# Altium PCB Morpheus_bottom.PcbDoc (part 2 of 2)
Units mm, origin at the board's own origin, x right, y up, seen from the top; angles counter-clockwise.
Board outline 38.8 x 25.11 mm, 4 copper layers (Top Layer, GND, PWR, Bottom Layer), stack 0.981 mm thick; 78 components, 39 nets, 307 pads, 147 vias.
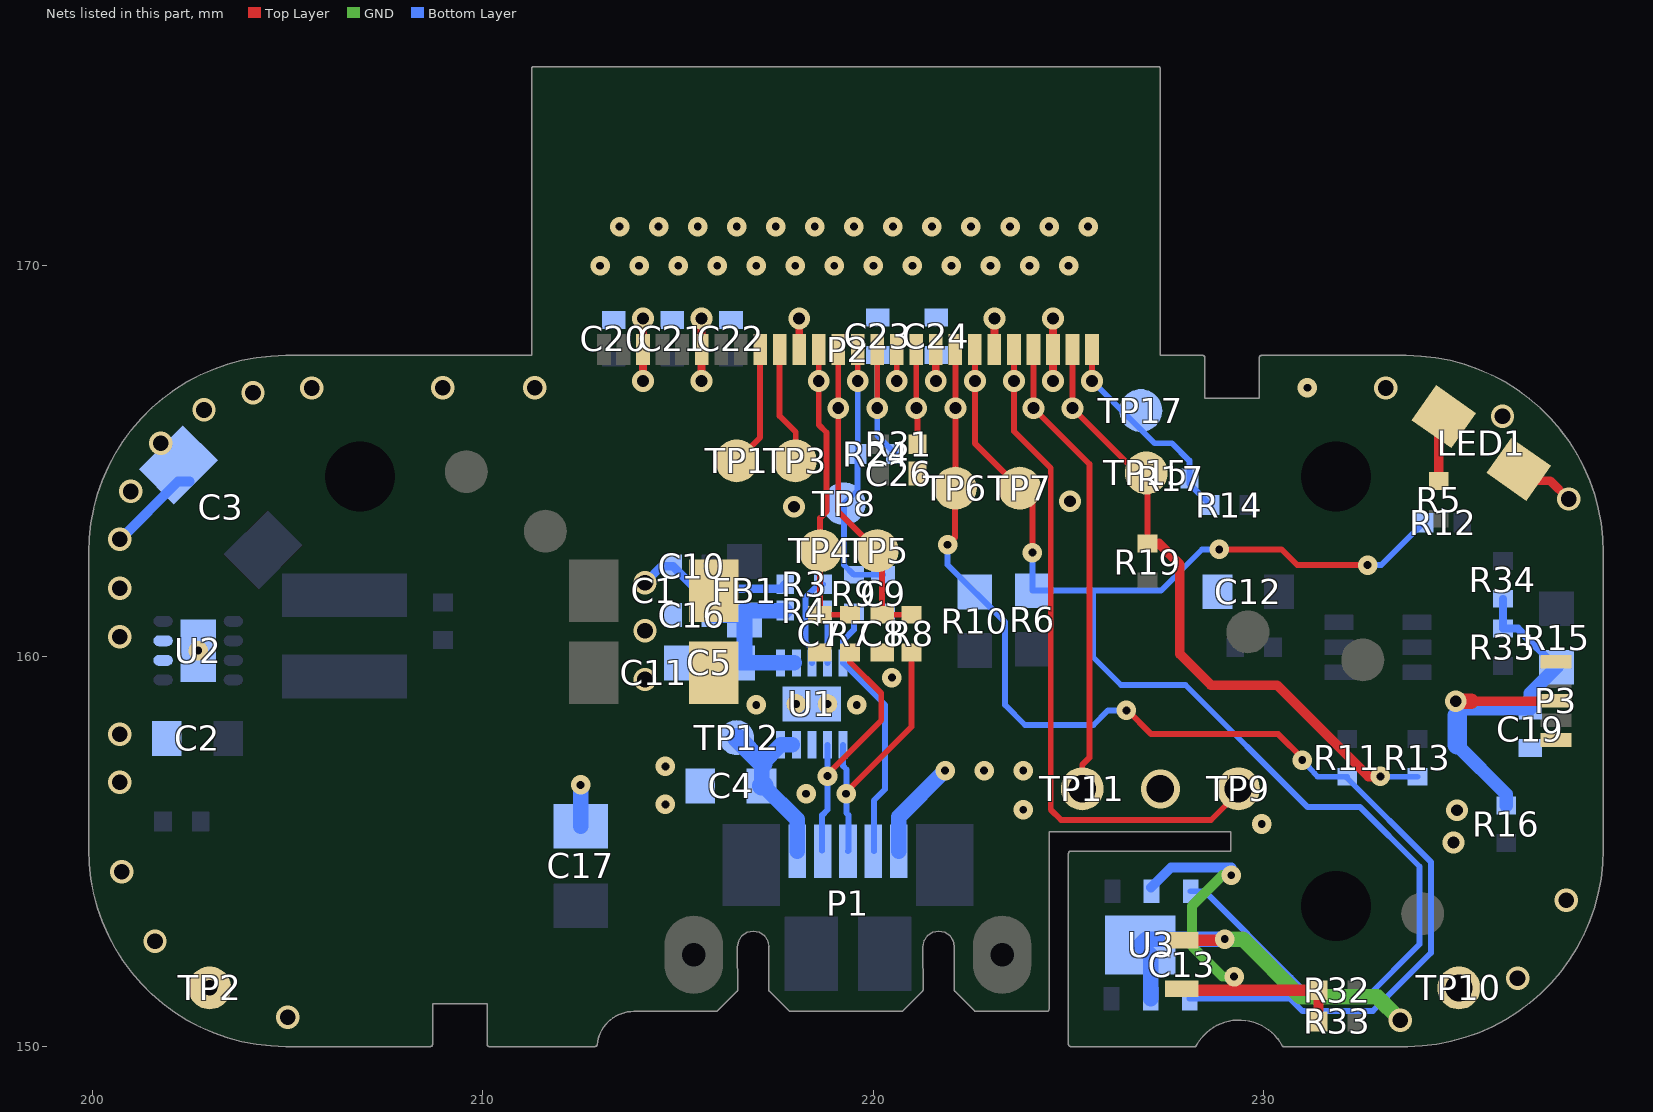
[diagram p4: the nets of this part, all layers, seen from the top]

## Via types
v1: diameter 0.5, hole 0.2, Top Layer to Bottom Layer, 45 vias
v2: diameter 0.6, hole 0.4, Top Layer to Bottom Layer, 40 vias
v3: diameter 0.559, hole 0.305, Top Layer to Bottom Layer, 31 vias
v4: diameter 0.5, hole 0.2, Top Layer to Bottom Layer, tented both sides, 26 vias
v5: diameter 1, hole 0.7, Top Layer to Bottom Layer, 4 vias
v6: diameter 2, hole 1.8, Top Layer to Bottom Layer, 1 vias

## Nets (pads, with @x,y where several pads share a name; then routed paths per layer and width w, separated by ;. In a path a pad name is that pad's centre, name@x,y a point inside that pad or via, vN(x,y) a via of type N, cw(c..) or ccw(c..) an arc to the next point about the centre after c; other vN are vias at no path point) (continued)
GND: C1.1 C2.1 C3.1 C4.1 C5.1 C7.1 C8.1 C9.1 C10.1 C11.1 C12.2 C13.1 C16.1 C17.2 C19.1 C20.2 C21.2 C22.2 C23.2 C24.2 C26.1 LED1.2 P1.5 P2.3 P2.6 P2.11 P2.21 P2.24 P3.1 P3.5 R3.2 TP2.1 TP10.1 U1.8 U1.11 U2.2 U2.3 U2.9 U3.2 U3.7 | length 27.7
  Top Layer w0.2: v3(214.1,167.05) P2.3@214.1,167.85 v3(214.1,168.65) ; v3(215.6,167.05) P2.6@215.6,167.85 v3(215.6,168.65) ; P2.11@218.1,167.85 v3(218.1,168.65) ; P2.21@223.1,167.85 v3(223.1,168.65) ; v3(224.6,167.05) P2.24@224.6,167.85 v3(224.6,168.65)
  Top Layer w0.22: LED1.2@236.868,164.491 237.339,164.491 v2(237.808,164.023)
  Top Layer w0.3: C13.1@227.9,152.725 v1@228.975,152.725
  GND w0.4: v1(229,152.75) 229.465,152.75 230.944,151.271 232.904,151.271 v2(233.5,150.675)
  Bottom Layer w0.22: v2(214.15,161.875) 214.575,162.3 C10.1@214.867,162.3 215.438,161.73 217.633,161.73 R3.2@217.742,161.839
  Bottom Layer w0.254: v2@200.712,162.991 202.193,164.471 C3.1@202.489,164.471
  Bottom Layer w0.4: C17.2@212.5,155.641 v1(212.5,156.7) ; P1.5@220.65,155 220.65,155.879 v1(221.837,157.066) ; U3.2@227.1,151.225 227.1,152.338 U3.7@226.837,152.6 226.987,152.75 v1(229,152.75)
  other v1: 229.948,155.699 223.837,156.066 214.675,156.2 218.275,156.475 222.837,157.066 223.837,157.066 214.675,157.175 217,158.75 219.575,158.75 220.475,159.45 202.707,160.141 231.117,166.875
  other v2: 205,150.75 203,151.5 236.5,151.75 201.6,152.7 237.75,153.75 200.748,154.475 200.7,156.766 200.7,158 214.15,159.4 200.7,160.5 214.15,160.65 200.7,161.741 200.7,162.991 200.982,164.217 201.747,165.45 236.115,166.139 202.855,166.305 204.111,166.748 205.612,166.867 208.975,166.875 211.325,166.875 233.123,166.867
  other v3: 234.862,155.229 234.95,156.052 217.97,163.825 225.037,163.966
  other v4: 213,170 214,170 215,170 216,170 217,170 218,170 219,170 220,170 221,170 222,170 223,170 224,170 225,170 213.5,171 214.5,171 215.5,171 216.5,171 217.5,171 218.5,171 219.5,171 220.5,171 221.5,171 222.5,171 223.5,171 224.5,171 225.5,171
  other v5: 235,151.5 227.35,156.6
I2C_SCL: P2.20 R6.1 R12.1 TP7.1 U3.6 | length 39.7
  Top Layer w0.15: P2.20@222.6,167.85 v3(222.6,167.05) 222.6,165.45 TP7.1@223.75,164.3 224.075,163.975 v1(224.075,162.65) ; v1(228.858,162.731) 230.458,162.731 230.856,162.333 v1(232.658,162.333)
  Bottom Layer w0.15: v1(224.075,162.65) R6.1@224.075,161.676 225.627,161.676 ; U3.6@228.125,153.975 228.487,153.975 230.692,151.769 231.206,151.257 232.629,151.257 233.99,152.619 233.99,154.609 232.461,156.137 231.116,156.137 227.994,159.259 226.343,159.259 225.627,159.975 225.627,161.676 ; v1(228.858,162.731) 228.419,162.731 227.365,161.676 225.627,161.676 ; v1(232.658,162.333) 233.008,162.333 234.09,163.414 R12.1@234.118,163.414
I2C_SDA: P2.19 R10.1 R11.1 TP6.1 U3.1 | length 32.1
  Top Layer w0.15: v1(221.9,162.85) 222.087,163.037 TP6.1@222.087,164.3 ; TP6.1@222.1,164.3 v3(222.1,166.35) P2.19@222.1,167.85 ; v1(226.481,158.607) v1@226.481,158.664 ; v1@226.481,158.635 227.116,158 230.37,158 v1@231.009,157.361
  Bottom Layer w0.15: v1(221.9,162.85) 221.9,162.34 223.375,160.865 223.375,158.745 223.882,158.237 225.637,158.237 226.007,158.607 v1(226.481,158.607) ; U3.1@228.1,151.225 230.672,151.225 230.988,150.909 232.794,150.909 234.28,152.395 234.28,154.729 232.119,156.89 R11.1@232.137,156.909 231.375,156.916 v1(230.985,157.337)
JTAG_TCK: P2.23 TP11.1 | length 11.9
  Top Layer w0.15: P2.23@224.1,167.85 v3(224.1,166.35) 225.532,164.918 225.532,157.398 225.35,157.216 v5(225.35,156.6)
JTAG_TDI: P2.26 R14.2 R17.1 TP17.1 | length 5.5
  Top Layer w0.15: v3(225.6,167.05) P2.26@225.6,167.85
  Bottom Layer w0.15: v3(225.6,167.05) 227.2,165.45 227.649,165.45 228.093,165.006 228.093,164.412 R14.2@228.638,163.867
JTAG_TDO: P2.25 R13.2 R19.1 TP15.1 | length 16.5
  Top Layer w0.15: P2.25@225.1,167.85 v3(225.1,166.35) TP15.1@227.002,164.448 ; R19.1@227.017,162.886 TP15.1@227.017,164.45 ; R19.1@227.025,162.883 227.316,162.883
  Top Layer w0.25: 227.316,162.883 227.85,162.349 227.85,160.053 228.648,159.255 230.338,159.255 232.677,156.916 v1(232.987,156.916)
  Bottom Layer w0.15: v1(232.987,156.916) 232.995,156.909 R13.2@233.937,156.909
JTAG_TMS: P2.22 TP9.1 | length 17.4
  Top Layer w0.15: P2.22@223.6,167.85 v3(223.6,167.05) 223.6,165.76 224.543,164.818 224.543,156.066 224.809,155.8 228.65,155.8 TP9.1@229.35,156.5
  other v5: 229.35,156.6
NetC13_2: C13.2 R32.1 R33.1 U3.5 | length 10.9
  Top Layer w0.254: C13.2@227.9,151.475 C13.2@227.934,151.441 ; R33.1@231.405,150.641 R32.1@231.405,151.441
  Top Layer w0.3: C13.2@227.934,151.441 R32.1@231.405,151.441 ; 229.24,151.451 v1(229.24,151.79)
  GND w0.254: v1(229.168,154.387) 228.947,154.387 228.162,153.603 228.162,152.57 228.942,151.79 v1(229.24,151.79)
  Bottom Layer w0.254: U3.5@227.112,154.075 227.621,154.583 229.168,154.583 v1(229.168,154.387)
NetLED1_1: LED1.1 R5.1 | length 1.6
  Top Layer w0.25: R5.1@234.483,164.482 LED1.1@234.483,166.065
NetR3_1: R3.1 U1.3 | length 2.3
  Bottom Layer w0.15: U1.3@218.425,159.825 218.425,160.194 218.264,160.355 218.264,161.507 218.596,161.839 R3.1@218.708,161.839
NetR4_1: R4.1 U1.4 | length 1.4
  Bottom Layer w0.15: R4.1@218.708,161.164 218.825,161.047 U1.4@218.825,159.825
SOP0: C24.1 P2.18 | length 1.5
  Top Layer w0.2: v3(221.6,167.05) P2.18@221.6,167.85
  Bottom Layer w0.15: v3(221.6,167.05) C24.1@221.6,167.75
SOP2: C23.1 P2.15 R24.1 | length 4.3
  Top Layer w0.15: v3(220.1,166.35) P2.15@220.1,167.85
  Bottom Layer w0.15: C23.1@220.1,167.75 v3(220.1,166.35) 220.1,165.65 R24.1@220.566,165.184
SPARE1: P2.16 | length 0.8
  Top Layer w0.15: v3(220.6,167.05) P2.16@220.6,167.85
SPARE2: P2.17 R31.1 | length 2.5
  Top Layer w0.15: P2.17@221.1,167.85 v3(221.1,166.35) 221.133,166.383 R31.1@221.133,165.425
USB_DM: C7.2 P2.12 R7.1 TP4.1 | length 7.7
  Top Layer w0.15: P2.12@218.6,167.85 v3(218.6,167.05) 218.6,165.925 218.8,165.725 218.8,163.7 218.637,163.537 TP4.1@218.637,162.7 218.637,161.07 C7.2@218.625,161.058 R7.1@219.4,161.058
USB_DP: C8.2 P2.13 R8.1 TP5.1 | length 8
  Top Layer w0.15: P2.13@219.1,167.85 v3(219.1,166.35) 219.1,163.7 TP5.1@220.1,162.7 220.225,162.575 C8.2@220.225,161.058 R8.1@220.975,161.058
USB_ID: C9.2 P2.14 R9.2 R24.2 TP8.1 | length 6.8
  Top Layer w0.15: v3(219.6,167.05) P2.14@219.6,167.85
  Bottom Layer w0.15: R24.2@219.592,165.175 219.592,164.242 TP8.1@219.25,163.9 219.25,162.333 R9.2@219.5,162.083 C9.2@220.25,162.083 ; R24.2@219.6,165.175 v3(219.6,167.05)
USB_PIN2: P1.2 R7.2 U1.7 | length 6.8
  Top Layer w0.15: v1(218.825,156.925) 218.825,156.975 220.2,158.35 220.2,159.05 219.4,159.85 R7.2@219.4,160.092
  Bottom Layer w0.15: P1.2@218.687,155.013 218.687,155.925 218.825,156.063 U1.7@218.825,157.725
USB_PIN3: P1.3 R8.2 U1.6 | length 7.1
  Top Layer w0.15: v1(219.3,156.475) 219.3,156.515 220.975,158.19 R8.2@220.975,160.092
  Bottom Layer w0.15: U1.6@219.225,157.725 219.225,157.183 219.311,157.097 219.311,155.976 219.362,155.925 219.362,155.012 P1.3@219.35,155
USB_PIN4: P1.4 R9.1 U1.5 | length 6.8
  Bottom Layer w0.15: R9.1@219.5,161.117 219.5,160.675 219.225,160.4 U1.5@219.225,159.825 220.3,158.75 220.3,156.588 220.012,156.3 P1.4@220.012,155
USB_RXD: P2.10 TP3.1 | length 3
  Top Layer w0.15: P2.10@217.6,167.85 217.6,167.05 217.6,166.151 218.012,165.739 TP3.1@218.012,164.988
USB_TXD: P2.9 TP1.1 | length 3.1
  Top Layer w0.15: TP1.1@216.5,165 217.1,165.6 P2.9@217.1,167.85
VBUS: C5.2 C16.2 FB1.1 R4.2 U1.1 U1.2 | length 4.7
  Bottom Layer w0.4: C16.2@215.833,161.05 FB1.1@216.576,161.05 ; R4.2@217.742,161.164 216.69,161.164 FB1.1@216.576,161.05 ; U1.2@217.97,159.825 C5.2@216.587,159.825 216.7,159.938 FB1.1@216.7,160.926 FB1.1@216.576,161.05
VBUS_IN: C4.2 P1.1 TP12.1 U1.9 U1.10 | length 4.7
  Bottom Layer w0.4: C4.2@217.137,156.675 217.137,157.237 217.154,157.254 217.17,157.27 U1.10@217.625,157.725 U1.9@217.92,157.725 ; C4.2@217.189,156.675 218.05,155.814 P1.1@218.05,155
  Bottom Layer w0.5: TP12.1@216.497,157.91 217.154,157.254 217.17,157.237 217.17,157.27 217.17,157.337 217.137,157.37 ; C4.2@217.137,156.675 C4.2@217.189,156.675
VCC_LED: C19.2 P3.3 R15.1 R16.1 R34.2 R35.2 | length 11.2
  Top Layer w0.25: 235.317,158.842 P3.3@237.483,158.842
  Top Layer w0.4: v3(234.917,158.842) 235.317,158.842
  Bottom Layer w0.2: 234.95,158.475 235.125,158.65 ; R34.2@236.125,161.467 R35.2@236.125,160.708 236.508,160.708 R15.1@237.5,159.715
  Bottom Layer w0.35: 234.95,157.725 236.212,156.463 R16.1@236.212,156.174 ; 235.125,158.65 236.825,158.65 236.825,159.04 R15.1@237.5,159.715
  Bottom Layer w0.5: 234.95,157.725 234.95,158.475
pads on no net: H2.1 H3.1 H4.1 U3.3 U3.4

## Polygon pours and split planes (outlines as drawn)
GND on GND "GND on GND" (solid, remove dead copper, pour order 30): 205,150 208.71,150 208.71,151.1 210.21,151.1 210.21,150 212.925,150 cw(c213.92,149.9) 213.92,150.9 216.025,150.9 216.525,151.4 216.516,152.5 216.551,152.676 216.651,152.824 216.799,152.924 216.975,152.959 217.151,152.924 217.299,152.824 217.399,152.676 217.434,152.5 217.425,152.5 217.425,151.4 217.925,150.9 220.775,150.9 221.275,151.4 221.266,152.5 221.301,152.676 221.401,152.824 221.549,152.924 221.725,152.959 221.901,152.924 222.049,152.824 222.149,152.676 222.184,152.5 222.175,152.5 222.175,151.4 222.675,150.9 224.5,150.9 224.5,155.5 229.25,155.5 229.25,155 225,155 225,150 233.7,150 ccw(c233.7,155) 238.7,155 238.7,162.6 ccw(c233.7,162.6) 233.7,167.6 229.99,167.6 229.99,166.5 228.49,166.5 228.49,167.6 227.35,167.6 227.35,175 211.35,175 211.35,167.6 205,167.6 ccw(c205,162.6) 200,162.6 200,155 ccw(c205,155)
CHASSIS_GND on GND "Chassis GND" (solid, remove dead copper, pour order 49): 215.2,153.3 215.2,150 206.888,150.009 205.188,153.234 205.613,155.1 207.018,155.334 208.313,154.734 209.363,153.609 213.213,153.609
5V on Top Layer "5V Top" (solid, remove dead copper, pour order 19): 213.725,167.8 212.975,167.8 211.567,164.232 210.701,163.799 210.701,158.076 214.001,158.076 214,165.45 213.725,166.625
GND on Top Layer "Top GND" (solid, remove dead copper, pour order 26): 205,150 208.71,150 208.71,151.1 210.21,151.1 210.21,150 212.925,150 cw(c213.92,149.9) 213.92,150.9 216.025,150.9 216.525,151.4 216.516,152.5 216.551,152.676 216.651,152.824 216.799,152.924 216.975,152.959 217.151,152.924 217.299,152.824 217.399,152.676 217.434,152.5 217.425,152.5 217.425,151.4 217.925,150.9 220.775,150.9 221.275,151.4 221.266,152.5 221.301,152.676 221.401,152.824 221.549,152.924 221.725,152.959 221.901,152.924 222.049,152.824 222.149,152.676 222.184,152.5 222.175,152.5 222.175,151.4 222.675,150.9 224.5,150.9 224.5,155.5 229.25,155.5 229.25,155 225,155 225,150 233.7,150 ccw(c233.7,155) 238.7,155 238.7,162.6 ccw(c233.7,162.6) 233.7,167.6 229.99,167.6 229.99,166.5 228.49,166.5 228.49,167.6 227.35,167.6 227.35,175 211.35,175 211.35,167.6 205,167.6 ccw(c205,162.6) 200,162.6 200,155 ccw(c205,155)
CHASSIS_GND on Top Layer "Chassis GND" (solid, remove dead copper, pour order 50): 224.515,153.016 224.515,149.991 206.89,149.991 205.19,153.216 205.615,155.082 207.02,155.316 208.315,154.716 209.365,153.591 213.215,153.591 217.19,153.016
3.3V on PWR "3.3V" (solid, remove dead copper, pour order 32): 208.325,162.85 215.425,162.85 215.425,167.825 208.325,167.825
CHASSIS_GND on PWR "Chassis GND" (solid, remove dead copper, pour order 48): 215.058,153.485 215.058,150.16 206.745,150.169 205.045,153.394 205.47,155.26 206.875,155.494 208.17,154.894 209.22,153.769 213.07,153.769
5V on PWR "5V PWR" (solid, remove dead copper, pour order 17): 212.526,157.797 212.526,162.547 210.876,162.547 208.626,160.297 208.626,158.697 208.426,158.497 204.876,158.497 203.826,159.597 202.751,159.597 202.75,155.4 210.125,155.4 212.026,157.797
5V on Bottom Layer "5V Bottom" (solid, remove dead copper, pour order 16): 213.6,162.475 215.575,162.475 215.575,162 217.15,162 217.15,163.65 216.95,163.975 216.95,164.675 213.025,164.675 210.884,162.546 208.634,160.296 208.634,158.696 208.434,158.496 204.884,158.496 203.834,159.596 203.284,159.596 203.284,158.871 202.759,158.346 202.759,155.146 203.709,155.146 203.85,155.4 210.125,155.4 212.05,157.8 213.6,157.8
CHASSIS_GND on Bottom Layer "Chassis GND" (solid, remove dead copper, pour order 51): 224.512,153.766 224.487,149.991 206.862,149.991 205.162,153.216 205.587,155.082 206.992,155.316 208.287,154.716 209.337,153.591 213.187,153.591 217.162,153.766
VBUS_IN on Bottom Layer "VBUS_IN" (solid, pour order 15): 218.25,155.85 216.575,155.85 216.575,157.5 217.075,157.65 217.5,158.075 218.15,158.075 218.15,157.375 217.825,157.05 217.825,156.35
3.3V on Bottom Layer "3.3V Bottom" (solid, remove dead copper, pour order 18): 203.159,160.568 203.175,163.325 205.925,166.075 211.5,166.075 212.022,163.956 208.709,160.568
3.3V_SWITCHER_SW on Bottom Layer "3.3V_SWITCHER_SW" (solid, remove dead copper, pour order 14): 208.625,160.525 203.575,160.533 203.575,159.858 204,159.433 204,159.133 204.625,158.508 208.425,158.508 208.625,158.708
GND on Bottom Layer "Bottom GND" (solid, remove dead copper, pour order 28): 205,149.993 208.71,149.993 208.71,151.093 210.21,151.093 210.21,149.993 212.925,149.993 cw(c213.92,149.893) 213.92,150.893 216.025,150.893 216.525,151.393 216.516,152.493 216.551,152.669 216.65,152.817 216.799,152.917 216.975,152.952 217.15,152.917 217.299,152.817 217.399,152.669 217.434,152.493 217.425,152.493 217.425,151.393 217.925,150.893 220.775,150.893 221.275,151.393 221.266,152.493 221.301,152.669 221.4,152.817 221.549,152.917 221.725,152.952 221.9,152.917 222.049,152.817 222.149,152.669 222.184,152.493 222.175,152.493 222.175,151.393 222.675,150.893 224.5,150.893 224.5,155.493 229.25,155.493 229.25,154.993 225,154.993 225,149.993 233.7,149.993 ccw(c233.7,154.993) 238.7,154.993 238.7,162.593 ccw(c233.7,162.593) 233.7,167.593 229.99,167.593 229.99,166.493 228.49,166.493 228.49,167.593 227.35,167.593 227.35,174.993 211.35,174.993 211.35,167.593 205,167.593 ccw(c205,162.593) 200,162.593 200,154.993 ccw(c205,154.993)

## Keep-outs
Top Layer:
  circle w0.013: c231.851,153.601 r1.5
  circle w0.013: c231.851,164.601 r1.5
  circle w0.013: c206.851,164.601 r1.5
Bottom Layer:
  circle w0.013: c206.851,164.601 r1.875
  circle w0.013: c231.851,153.601 r1.875
  circle w0.013: c231.851,164.601 r1.875
Keep-Out Layer:
  lines w0.1: 229.25,155 229.25,155.5 ; 233.7,149.989 230.568,149.993 ccw(c229.423,149.377) 228.28,149.996 225.1,150 225.1,154.9 229.25,154.9 229.25,155.5 ; 233.7,150 ccw(c233.7,155) 238.7,155 238.7,162.6 ccw(c233.7,162.6) 233.7,167.6 229.99,167.6 229.99,166.5 228.49,166.5 228.49,167.6 227.35,167.6 227.35,175 211.35,175 211.35,167.6 205,167.6 ccw(c205,162.6) 200,162.6 200,155 ccw(c205,155) 205,150 208.71,150 ; 208.71,150 208.71,151.1 ; 208.71,150 208.71,151.1 ; 208.71,151.1 210.21,151.1 ; 208.71,151.1 210.21,151.1 ; 210.21,150 210.21,151.1 ; 210.21,150 212.925,150 ; 210.21,150 210.21,151.1 ; 210.21,150 212.925,150 ; 212.925,150 cw(c213.92,149.9) 213.92,150.9 ; 212.925,150 cw(c213.92,149.9) 213.92,150.9 ; 213.92,150.9 216.025,150.9 ; 213.92,150.9 216.025,150.9 ; 216.025,150.9 216.525,151.4 ; 216.025,150.9 216.525,151.4 ; 216.516,152.5 216.551,152.676 ; 216.516,152.5 216.525,151.4 ; 216.516,152.5 216.551,152.676 ; 216.516,152.5 216.525,151.4 ; 216.551,152.676 216.651,152.824 ; 216.551,152.676 216.651,152.824 ; 216.651,152.824 216.799,152.924 ; 216.651,152.824 216.799,152.924 ; 216.799,152.924 216.975,152.959 ; 216.799,152.924 216.975,152.959 ; 216.975,152.959 217.151,152.924 ; 216.975,152.959 217.151,152.924 ; 217.151,152.924 217.299,152.824 ; 217.151,152.924 217.299,152.824 ; 217.299,152.824 217.399,152.676 ; 217.299,152.824 217.399,152.676 ; 217.399,152.676 217.434,152.5 217.399,152.676 ; 217.425,151.4 217.925,150.9 ; 217.425,151.4 217.425,152.5 217.425,151.4 ; 217.425,151.4 217.925,150.9 ; 217.925,150.9 220.775,150.9 ; 217.925,150.9 220.775,150.9 ; 220.775,150.9 221.275,151.4 ; 220.775,150.9 221.275,151.4 ; 221.266,152.5 221.301,152.676 ; 221.266,152.5 221.275,151.4 ; 221.266,152.5 221.301,152.676 ; 221.266,152.5 221.275,151.4 ; 221.301,152.676 221.401,152.824 ; 221.301,152.676 221.401,152.824 ; 221.401,152.824 221.549,152.924 ; 221.401,152.824 221.549,152.924 ; 221.549,152.924 221.725,152.959 ; 221.549,152.924 221.725,152.959 ; 221.725,152.959 221.901,152.924 ; 221.725,152.959 221.901,152.924 ; 221.901,152.924 222.049,152.824 ; 221.901,152.924 222.049,152.824 ; 222.049,152.824 222.149,152.676 ; 222.049,152.824 222.149,152.676 ; 222.149,152.676 222.184,152.5 222.149,152.676 ; 222.175,151.4 222.675,150.9 ; 222.175,151.4 222.175,152.5 222.175,151.4 ; 222.175,151.4 222.675,150.9 ; 222.675,150.9 224.5,150.9 ; 222.675,150.9 224.5,150.9 ; 224.5,150.9 224.5,155.5 229.25,155.5
Mechanical 3:
  circle w0.013: c206.851,153.601 r1.875

## Other copper
Bottom Layer:
  rectangle net CHASSIS_GND: 211.5,152.4 213.5,153.6
Multi-Layer:
  pour cut-out: 229.25,155.5 225,155 225,150 232.257,149.975 232.258,154.35
  pour cut-out: 224.512,153.766 224.512,155.866 215.187,155.866 213.2,155.6 210.1,155.6 209.225,156.175 208.85,156.475 208.4,156.75 207.887,156.941 207.637,156.991 207.412,157.041 207.087,157.091 206.787,157.091 206.312,157.041 205.837,156.941 205.512,156.816 205.112,156.616 204.737,156.366 204.25,155.95 203.9,155.5 203.625,155 203.425,154.325 203.35,153.85 203.375,153.2 203.45,152.75 203.6,152.275 203.8,151.95 204,151.75 204.25,151.575 204.5,151.475 204.775,151.4 cw(c204.775,150.775) 205.4,150.775 205.4,150 206.85,150 206.85,151 ccw(c205.522,151) 206.461,151.939 206.1,152.3 205.675,152.65 205.375,153.275 205.348,153.675 205.425,154.075 205.625,154.475 205.975,154.825 206.375,155.025 206.825,155.1 207.35,155.025 207.75,154.8 208,154.55 208.2,154.225 208.454,153.971 ccw(c209.35,154.867) 209.35,153.6 213.2,153.6 217.187,153.766

## Silkscreen, mask and mechanical layers (free items; w line width, h text height)
Top Overlay:
  lines w0.125: 217.571,163.428 218.044,163.1 ; 220.827,162.728 221.3,162.4
  text "TCK" at 223.9,157.45 h0.7
  text "GND" at 226.397,157.445 h0.7
  text "TMS" at 228.925,157.45 h0.7
Bottom Overlay:
  region: 221.598,172.047 221.598,173.046 ccw(c221.265,173.046) 221.265,173.378 220.599,173.378 ccw(c220.599,173.046) 220.267,173.046 220.267,172.38 ccw(c220.599,172.38) 220.599,172.047 221.598,172.047 220.932,172.216 ccw(c220.932,172.713) 221.429,172.713 ccw(c220.932,172.713) 220.932,173.209 ccw(c220.932,172.713) 220.435,172.713 ccw(c220.932,172.713) 220.932,172.216
  region: 221.266,172.709 220.601,172.709 ccw(c220.933,172.709) 220.933,172.376 ccw(c220.933,172.709) 221.266,172.709
  lines w0.01: 220.268,172.376 ccw(c220.6,172.376) 220.6,172.043 220.933,172.043 221.599,172.043 221.599,173.042 ccw(c221.266,173.042) 221.266,173.374 220.6,173.374 ccw(c220.6,173.042) 220.268,173.042 220.268,172.376 ; 220.437,172.709 cw(c220.933,172.709) 220.933,173.205 cw(c220.933,172.709) 221.43,172.709 cw(c220.933,172.709) 220.933,172.212 cw(c220.933,172.709) 220.437,172.709 ; 220.601,172.709 ccw(c220.933,172.709) 220.933,172.376 ccw(c220.933,172.709) 221.266,172.709 220.601,172.709
  lines w0.1: 218.581,164.825 218.875,164.55
  text "Model MA14214" at 223.444,173.634 h0.7
  text "2015   Hello Inc." at 224.536,172.3 h0.7
  text "905-00005-B" at 222.961,171.044 h0.7
Mechanical 1:
  lines w0.1: 217.425,152.5 217.425,151.4 217.925,150.9 220.775,150.9 221.275,151.4 221.266,152.5 221.301,152.676 221.401,152.824 221.549,152.924 221.725,152.959 221.901,152.924 222.049,152.824 222.149,152.676 222.184,152.5 ; 217.434,152.5 217.399,152.676 217.299,152.824 217.151,152.924 216.975,152.959 216.799,152.924 216.651,152.824 216.551,152.676 216.516,152.5 216.525,151.4 216.025,150.9 213.92,150.9 ccw(c213.92,149.9) 212.925,150 210.21,150 210.21,151.1 208.71,151.1 208.71,150 205,150 cw(c205,155) 200,155 200,162.6 cw(c205,162.6) 205,167.6 211.35,167.6 211.35,175 227.35,175 227.35,167.6 228.49,167.6 228.49,166.5 229.99,166.5 229.99,167.6 233.7,167.6 cw(c233.7,162.6) 238.7,162.6 238.7,155 cw(c233.7,155) 233.7,150 225,150 225,155 229.25,155 229.25,155.5 224.5,155.5 224.5,150.9 222.675,150.9 222.175,151.4 222.175,152.5
Mechanical 2:
  circle w0.1: c206.85,164.6 r0.9
  circle w0.1: c231.85,164.6 r0.9
  circle w0.1: c231.85,153.6 r0.9
Mechanical 3:
  drawing of 1651 lines, arcs and shapes, not listed
Mechanical 4:
  drawing of 477 lines, arcs and shapes, not listed
Mechanical 10:
  drawing of 861 lines, arcs and shapes, not listed
Mechanical 13:
  drawing of 541 lines, arcs and shapes, not listed
Mechanical 15:
  drawing of 1448 lines, arcs and shapes, not listed
Drill Drawing:
  drawing of 3487 lines, arcs and shapes, not listed
  text "5" at 289.959,373.039 h2.38
  text "6" at 239.667,373.025 h2.38
  text "4" at 340.393,372.997 h2.38
  text "2" at 440.385,373.011 h2.38
  text "8" at 138.331,372.892 h2.38
  text "1" at 491.856,372.856 h2.38
  text "7" at 190.195,372.82 h2.38
  text "3" at 390.378,372.833 h2.38
  text "D" at 518.88,338.843 h2.38
  text "D" at 110.887,337.993 h2.38
  text "Fabrication / Assembly Notes" at 181.025,333.175 h3
  text "1. Material: Rigid FR-4, RoHS compliant: material should meet or exceed requirements of IPC 4101/126. ITEQ IT-180A Pre-approved." at 181.025,330.175 h1.52
  text "2. Number of electrical layers: 4" at 181.025,327.175 h1.52
  text "3. Trace / Space minimum: 5mil (all layers)" at 181.025,324.175 h1.52
  text "4. Thickness: .97mm +/- 0.1mm (finished)" at 181.025,321.175 h1.52
  text "5. Finish:  ENIG plating on exposed copper" at 181.025,318.175 h1.52
  text "6. Soldermask: per IPC-SM-840, color matte black registration within +/- 76um of circuit layer" at 181.025,315.175 h1.52
  text "7. Silkscreen: use white silkscreen on top and bottom layers.  Clip on pads." at 181.025,312.175 h1.52
  text "8. RoHS: parts shall be RoHS compliant as per European Union directive 2002/95/EC" at 181.025,309.175 h1.52
  text "9. Board must be lead free process compatible and able to withstand minimum of" at 181.025,306.175 h1.52
  text "5 cycles at 250 degrees celsius" at 185.525,303.175 h1.52
  text "10. All Test/QA/QC markings, if present, to be made on back side of PCB" at 181.025,300.175 h1.52
  text "11. x mousebites shall be no larger than 0.05 mm" at 181.025,297.175 h1.52
  text "12. All Dimensions are after plating/finishing" at 181.025,294.175 h1.52
  text "13. All components must be placed within +/- 0.10mm" at 181.025,291.175 h1.52
  text "Layer" at 182.568,280.956 h1.52
  text "Name" at 192.98,280.956 h1.52
  text "Material" at 216.596,280.956 h1.52
  text "Thickness" at 238.434,280.956 h1.52
  text "Constant" at 254.939,280.956 h1.52
  text "Board Layer Stack" at 269.414,280.956 h1.52
  text "1" at 182.568,277.908 h1.52
  text "Top Overlay" at 192.98,277.908 h1.52
  text "2" at 182.568,274.86 h1.52
  text "Top Solder" at 192.98,274.86 h1.52
  text "Solder Resist" at 216.596,274.86 h1.52
  text "0.010mm" at 238.434,274.86 h1.52
  text "3.5" at 254.939,274.86 h1.52
  text "C" at 110.854,273.294 h2.38
  text "C" at 518.368,273.161 h2.38
  text "3" at 182.568,271.812 h1.52
  text "Top Layer" at 192.98,271.812 h1.52
  text "Copper" at 216.596,271.812 h1.52
  text "0.036mm" at 238.434,271.812 h1.52
  text "4" at 182.568,268.764 h1.52
  text "Dielectric1" at 192.98,268.764 h1.52
  text "FR-4" at 216.596,268.764 h1.52
  text "0.254mm" at 238.434,268.764 h1.52
  text "4.2" at 254.939,268.764 h1.52
  text "5" at 182.568,265.716 h1.52
  text "GND" at 192.98,265.716 h1.52
  text "Copper" at 216.596,265.716 h1.52
  text "0.036mm" at 238.434,265.716 h1.52
  text "6" at 182.568,262.668 h1.52
  text "Dielectric2" at 192.98,262.668 h1.52
  text "FR-4" at 216.596,262.668 h1.52
  text "0.330mm" at 238.434,262.668 h1.52
  text "4.2" at 254.939,262.668 h1.52
  text "7" at 182.568,259.62 h1.52
  text "PWR" at 192.98,259.62 h1.52
  text "Copper" at 216.596,259.62 h1.52
  text "0.036mm" at 238.434,259.62 h1.52
  text "8" at 182.568,256.572 h1.52
  text "Dielectric3" at 192.98,256.572 h1.52
  text "FR-4" at 216.596,256.572 h1.52
  text "0.254mm" at 238.434,256.572 h1.52
  text "4.2" at 254.939,256.572 h1.52
  text "9" at 182.568,253.524 h1.52
  text "Bottom Layer" at 192.98,253.524 h1.52
  text "Copper" at 216.596,253.524 h1.52
  text "0.036mm" at 238.434,253.524 h1.52
  text "10" at 182.568,250.476 h1.52
  text "Bottom Solder" at 192.98,250.476 h1.52
  text "Solder Resist" at 216.596,250.476 h1.52
  text "0.010mm" at 238.434,250.476 h1.52
  text "3.5" at 254.939,250.476 h1.52
  text "11" at 182.568,247.428 h1.52
  text "Bottom Overlay" at 192.98,247.428 h1.52
  text "Symbol" at 183.341,241.942 h1.83
  text "Hit Count" at 196.19,241.942 h1.83
  text "Finished Hole Size" at 213.915,241.942 h1.83
  text "Plated" at 248.093,241.942 h1.83
  text "Hole Type" at 260.943,241.942 h1.83
  text "1" at 196.19,238.132 h1.52
  text "1.800mm (70.87mil)" at 213.915,238.132 h1.52
  text "PTH" at 248.093,238.132 h1.52
  text "Round" at 260.943,238.132 h1.52
  text "2" at 196.19,234.322 h1.52
  text "0.600mm (23.62mil)" at 213.915,234.322 h1.52
  text "PTH" at 248.093,234.322 h1.52
  text "Slot" at 260.943,234.322 h1.52
  text "3" at 196.19,230.512 h1.52
  text "1.800mm (70.87mil)" at 213.915,230.512 h1.52
  text "NPTH" at 248.093,230.512 h1.52
  text "Round" at 260.943,230.512 h1.52
  text "4" at 196.19,226.702 h1.52
  text "0.700mm (27.56mil)" at 213.915,226.702 h1.52
  text "PTH" at 248.093,226.702 h1.52
  text "Round" at 260.943,226.702 h1.52
  text "31" at 196.19,222.892 h1.52
  text "0.305mm (12.00mil)" at 213.915,222.892 h1.52
  text "PTH" at 248.093,222.892 h1.52
  text "Round" at 260.943,222.892 h1.52
  text "40" at 196.19,219.082 h1.52
  text "0.400mm (15.75mil)" at 213.915,219.082 h1.52
  text "PTH" at 248.093,219.082 h1.52
  text "Round" at 260.943,219.082 h1.52
  text "73" at 196.19,215.272 h1.52
  text "0.200mm (7.87mil)" at 213.915,215.272 h1.52
  text "PTH" at 248.093,215.272 h1.52
  text "Round" at 260.943,215.272 h1.52
  text "154 Total" at 196.19,211.462 h1.52
  text "B" at 110.831,209.36 h2.38
  text "B" at 519.392,209.001 h2.38
  text "Slot definitions :" at 183.341,207.78 h1.52
  text "Rout Path Length" at 209.572,207.78 h1.52
  text "= Calculated from tool start centre position to tool end centre position." at 234.532,207.78 h1.52
  text "Physical Length" at 209.572,205.24 h1.52
  text "= Rout Path Length + Tool Size = Slot length as defined in the PCB layout" at 233.009,205.24 h1.52
  text "21.18" at 235.794,182.659 h1
  text "+/-0.05" at 241.544,182.659 h1
  text "19.78" at 235.794,179.409 h1
  text "+/-0.04" at 241.544,179.409 h1
  text "25.09" at 177.51,176.507 h1
  text "+/-0.05" at 182.789,176.507 h1
  text "18.63" at 235.794,176.409 h1
  text "+/-0.03" at 241.544,176.409 h1
  text "17.71" at 175.064,170.286 h1
  text "+/-0.05" at 180.343,170.286 h1
  text "1.80" at 250.346,168.928 h1
  text "4 X" at 246.294,168.909 h1
  text "+/-0.02" at 255.044,168.909 h1
  text "*" at 208.762,165.591 h4
  text "*" at 232.012,165.541 h4
  text "DRAFTER" at 403.472,158.096 h1
  text "DATE" at 426.987,158.096 h1
  text "16.61" at 245.044,157.409 h1
  text "+/-0.05" at 250.544,157.409 h1
  text "2 X" at 266.044,157.409 h1
  text "14.66" at 270.044,157.409 h1
  text "+/-0.05" at 275.544,157.409 h1
  text "METRIC" at 379.668,157.277 h1.78
  text "1.10" at 169.614,153.399 h1
  text "+/-0.02" at 173.719,153.399 h1
  text "DIMENSIONS ARE IN MILLIMETERS" at 369.278,153.225 h1
  text "DESIGNER" at 403.681,150.927 h1
  text "DATE" at 426.987,150.927 h1
  text "TOLERANCES:" at 369.278,150.755 h1
  text "*" at 233.6,147.975 h4
  text "*" at 206.412,147.957 h4
  text "05/05/2015" at 427.1,147.8 h1.52
  text "dfusi / rsb/ ben" at 404.8,147.7 h1.2
  text "0.10" at 390.529,147.593 h1.5
  text "0 > - < 2" at 373.111,147.486 h1.5
  text "TITLE:" at 447.05,147.275 h2.54
  text "1.40" at 217.271,146.489 h1
  text "+/-0.02" at 221.377,146.489 h1
  text "2 > - < 10" at 373.039,144.68 h1.5
  text "0.10" at 390.529,144.68 h1.5
  text "2 X" at 249.294,144.159 h1
  text "3.66" at 253.294,144.159 h1
  text "+/-0.03" at 258.044,144.159 h1
  text "A" at 518.645,142.796 h2.38
  text "PROPRIETARY AND CONFIDENTIAL" at 403.7,142.475 h1.5
  text "A" at 110.821,142.37 h2.38
  text "10 > - < 50" at 371.93,141.656 h1.5
  text "0.10" at 390.529,141.656 h1.5
  text "Morpheus Bottom Board" at 450.3,141.1 h3
  text "8.81" at 173.435,139.466 h1
  text "+/-0.03" at 177.54,139.466 h1
  text "23.09" at 213.739,139.432 h1
  text "+/-0.05" at 219.018,139.432 h1
  text "50 > - < 100" at 372.004,138.684 h1.5
  text "0.15" at 390.529,138.684 h1.5
  text "THE INFORMATION CONTAINED IN" at 403.982,137.72 h1.5
  text "* = mousebites (qty 4)" at 242.72,136.03 h3.18
  text "100 > - < 200" at 370.895,135.606 h1.5
  text "0.20" at 390.529,135.606 h1.5
  text "THIS DRAWING IS THE SOLE" at 403.982,134.97 h1.5
  text "2 X" at 186.52,133.432 h1
  text "1.91" at 190.156,133.432 h1
  text "+/-0.02" at 194.261,133.432 h1
  text "PROPERTY OF HELLO INC." at 403.982,132.22 h1.5
  text "200 > -" at 370.895,132.162 h1.5
  text "0.20" at 390.529,132.162 h1.5
  text "ANGLES" at 373.101,127.598 h1.5
  text "1.00" at 390.529,127.575 h1.5
  text "ANY REPRODUCTION IN PART OR" at 403.982,126.72 h1.5
  text "SIZE" at 447.45,125.25 h2
  text "DWG.  NO." at 456.738,125.204 h2
  text "REV" at 505.742,125.105 h2
  text "AS A WHOLE, WITHOUT THE" at 403.982,123.97 h1.5
  text "WRITTEN PERMISSION OF HELLO" at 403.982,121.22 h1.5
  text "201-00005-B" at 461.5,120.125 h2
  text "INC IS PROHIBITED." at 403.982,118.47 h1.5
  text "B" at 449.075,118.05 h5
  text "SCALE: 2:1" at 447.1,111.65 h2
  text "SHEET 1 OF 1" at 492.55,111.65 h2
  text "WEIGHT:" at 468,111.55 h2
  text "4" at 338.592,105.917 h2.38
  text "7" at 190.359,105.728 h2.38
  text "6" at 240.178,105.738 h2.38
  text "8" at 138.78,105.721 h2.38
  text "2" at 439.149,105.708 h2.38
  text "3" at 389.021,105.687 h2.38
  text "5" at 290.122,105.661 h2.38
  text "1" at 491.371,105.426 h2.38
Mechanical 17:
  drawing of 77 lines, arcs and shapes, not listed
Mechanical 18:
  lines w0.325: 216.6,154.525 ccw(c216.925,154.525) 217.25,154.525 217.25,154.925 ccw(c216.925,154.925) 216.6,154.925 216.6,154.525 ; 216.763,154.725 cw(c216.925,154.725) 217.088,154.725 cw(c216.925,154.725) 216.763,154.725 ; 221.45,154.525 ccw(c221.775,154.525) 222.1,154.525 222.1,154.925 ccw(c221.775,154.925) 221.45,154.925 221.45,154.525 ; 221.613,154.725 cw(c221.775,154.725) 221.938,154.725 cw(c221.775,154.725) 221.613,154.725
  lines w0.35: 214.9,151.345 ccw(c215.25,151.345) 215.6,151.345 215.6,151.945 ccw(c215.25,151.945) 214.9,151.945 214.9,151.345 ; 223.1,151.345 ccw(c223.45,151.345) 223.8,151.345 223.8,151.945 ccw(c223.45,151.945) 223.1,151.945 223.1,151.345

## Text inside footprints (layer, text, board x,y; h text height)
P2: Top Overlay "1" at 212.39,166.6 h0.7